# Altium PCB opm.PcbDoc (part 2 of 6)
Units mil, origin at the board's own origin, x right, y up, seen from the top; angles counter-clockwise.
Board outline 4280 x 1445 mil, 4 copper layers (Signal Plane 1, Ground, Power, Signal Plane 2), stack 59.778 mil thick; 104 components, 61 nets, 369 pads, 159 vias.
Unrouted connection lines stored in the file: 4.
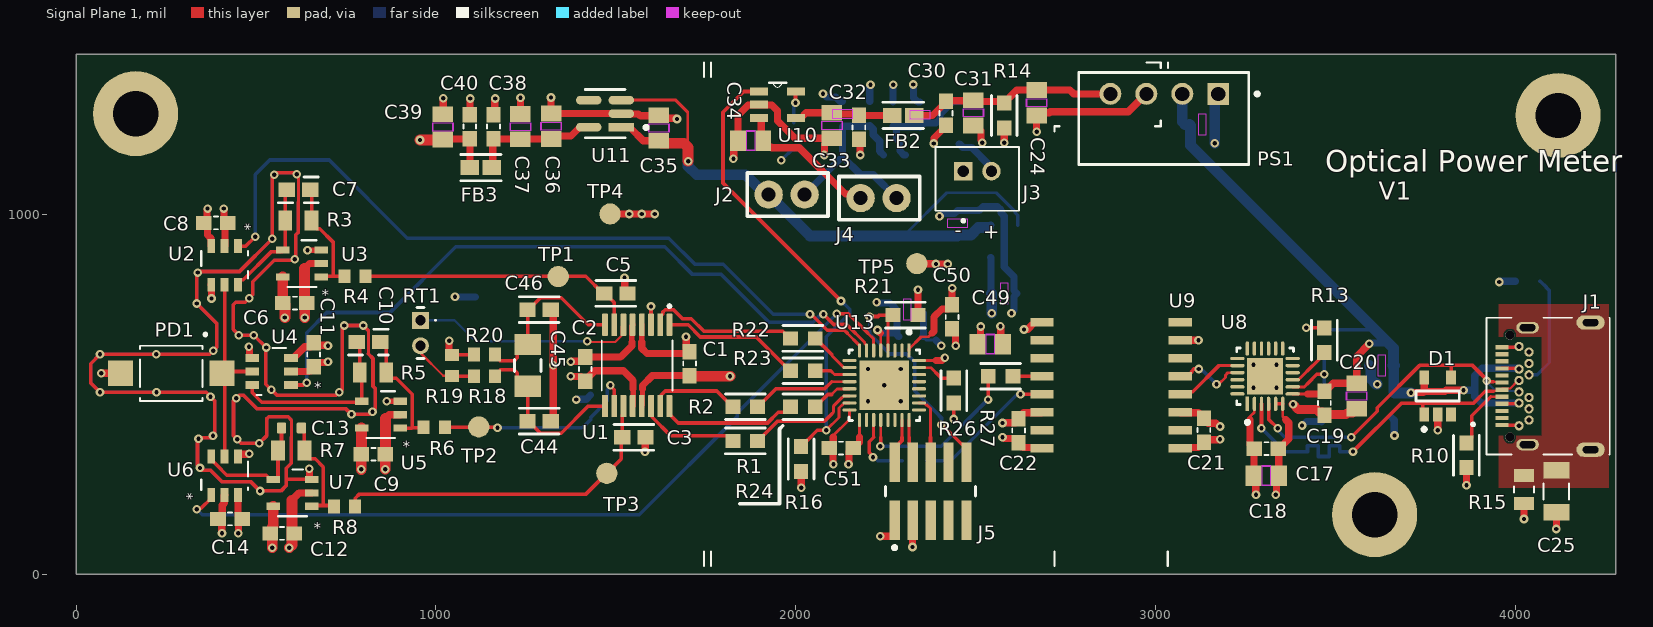
[diagram p0: Signal Plane 1 view]

## Part data (continued)
C25: library part VJ1206Y472KXEAT5Z, "Multilayer Ceramic Capacitor, 4700 pF, 500 V, ± 10%, X7R, 1206 [3216 Metric]", Case Code (Imperial)=1206, Case Code (Metric)=3216, Dielectric=X7R, Dielectric Material=Ceramic, Manufacturer=Vishay, Max Operating Temperature=125°C, Min Operating Temperature=-55°C, Supplier Part Number=720-1031-1-ND, Tolerance=10%, Voltage Rating=500V, Case/Package=1206, Category="Ceramic Capacitors", China RoHS=Compliant, ComponentLink1Description=https://datasheet.octopart.com:443/VJ1206Y472KXEAT5Z-Vishay-datasheet-159617168.pdf?src-supplier=Farnell, ComponentLink1URL=https://datasheet.octopart.com:443/VJ1206Y472KXEAT5Z-Vishay-datasheet-159617168.pdf?src-supplier=Farnell, ComponentLink2Description=https://datasheet.octopart.com:443/VJ1206Y472KXEAT5Z-Vishay-datasheet-149523907.pdf?src-supplier=element14+APAC, ComponentLink2URL=https://datasheet.octopart.com:443/VJ1206Y472KXEAT5Z-Vishay-datasheet-149523907.pdf?src-supplier=element14+APAC, ComponentLink3Description=https://datasheet.octopart.com:443/VJ1206Y472KXEAT5Z-Vishay-datasheet-13557233.pdf?src-supplier=Factory+Futures, ComponentLink3URL=https://datasheet.octopart.com:443/VJ1206Y472KXEAT5Z-Vishay-datasheet-13557233.pdf?src-supplier=Factory+Futures, ComponentLink4Description=https://datasheet.octopart.com:443/VJ1206Y472KXEAT5Z-Vishay-datasheet-12552536.pdf?src-supplier=Factory+Futures, ComponentLink4URL=https://datasheet.octopart.com:443/VJ1206Y472KXEAT5Z-Vishay-datasheet-12552536.pdf?src-supplier=Factory+Futures, ComponentLink5Description=https://datasheet.octopart.com:443/VJ1206Y472KXEAT5Z-Vishay-datasheet-12538810.pdf?src-supplier=Factory+Futures, ComponentLink5URL=https://datasheet.octopart.com:443/VJ1206Y472KXEAT5Z-Vishay-datasheet-12538810.pdf?src-supplier=Factory+Futures, ComponentLink6Description=https://datasheet.octopart.com:443/VJ1206Y472KXEAT5Z-Vishay-datasheet-12527091.pdf?src-supplier=Factory+Futures, ComponentLink6URL=https://datasheet.octopart.com:443/VJ1206Y472KXEAT5Z-Vishay-datasheet-12527091.pdf?src-supplier=Factory+Futures, ComponentLink7Description=https://datasheet.octopart.com:443/VJ1206Y472KXEAT5Z-Vishay-datasheet-12511790.pdf?src-supplier=Factory+Futures, ComponentLink7URL=https://datasheet.octopart.com:443/VJ1206Y472KXEAT5Z-Vishay-datasheet-12511790.pdf?src-supplier=Factory+Futures, ComponentLink8Description=https://datasheet.octopart.com:443/VJ1206Y472KXEAT5Z-Vishay-datasheet-12511142.pdf?src-supplier=Factory+Futures, ComponentLink8URL=https://datasheet.octopart.com:443/VJ1206Y472KXEAT5Z-Vishay-datasheet-12511142.pdf?src-supplier=Factory+Futures, ComponentLink9Description=https://datasheet.octopart.com:443/VJ1206Y472KXEAT5Z-Vishay-datasheet-15670510.pdf?src-supplier=Future+Electronics, ComponentLink9URL=https://datasheet.octopart.com:443/VJ1206Y472KXEAT5Z-Vishay-datasheet-15670510.pdf?src-supplier=Future+Electronics, ComponentLink10Description=https://datasheet.octopart.com:443/VJ1206Y472KXEAT5Z-Vishay-datasheet-10404631.pdf?src-supplier=Future+Electronics, ComponentLink10URL=https://datasheet.octopart.com:443/VJ1206Y472KXEAT5Z-Vishay-datasheet-10404631.pdf?src-supplier=Future+Electronics, ComponentLink11Description=https://datasheet.octopart.com:443/VJ1206Y472KXEAT5Z-Vishay-datasheet-10052095.pdf?src-supplier=Future+Electronics, ComponentLink11URL=https://datasheet.octopart.com:443/VJ1206Y472KXEAT5Z-Vishay-datasheet-10052095.pdf?src-supplier=Future+Electronics, ComponentLink12Description=https://datasheet.octopart.com:443/VJ1206Y472KXEAT5Z-Vishay-datasheet-8361628.pdf?src-supplier=Future+Electronics, ComponentLink12URL=https://datasheet.octopart.com:443/VJ1206Y472KXEAT5Z-Vishay-datasheet-8361628.pdf?src-supplier=Future+Electronics, ComponentLink13Description=https://datasheet.octopart.com:443/VJ1206Y472KXEAT5Z-Vishay-datasheet-5311911.pdf?src-supplier=Future+Electronics, ComponentLink13URL=https://datasheet.octopart.com:443/VJ1206Y472KXEAT5Z-Vishay-datasheet-5311911.pdf?src-supplier=Future+Electronics, ComponentLink14Description=https://datasheet.octopart.com/VJ1206Y472KXEAT5Z-Vishay-datasheet-14932079.pdf, ComponentLink14URL=https://datasheet.octopart.com/VJ1206Y472KXEAT5Z-Vishay-datasheet-14932079.pdf, ComponentLink15Description=http://sigma.octopart.com:80/rohs_statement/Vishay-company-15.pdf?src-supplier=Compliance+Statements, ComponentLink15URL=http://sigma.octopart.com:80/rohs_statement/Vishay-company-15.pdf?src-supplier=Compliance+Statements, Country of Origin=Israel, Export Control Classification Number (ECCN) Code=EAR99, Harmonized Tariff Schedule (HTS) Code=8532.24.00.20, Height=1.7mm, Introduction Date=2007-05-08, Lead Free="Lead Free", Length=3.2mm, Lifecycle Status=Production, Manufacturer Part Number=VJ1206Y472KXEAT5Z, Mounting Technology="Surface Mount", Number of Terminals=2, Packaging=Digi-Reel®, Pricing="1=1.07, 10=0.674, 50=0.5412, 100=0.4947, 500=0.4161, 1000=0.3918 (USD)", REACH SVHC=Yes, RoHS=Compliant, Stock=10395, Supplier=DigiKey, Supplier 1=DigiKey, Supplier Part Number 1=720-1031-1-ND, Termination=SMD/SMT, Thickness=1.7018mm, Voltage Rating (DC)=500V, Width=1.6mm
C35 C36 C41 C42 C48: library part CC0805KKX7R7BB105, "16V 1uF X7R ±10% 0805 Multilayer Ceramic Capacitors MLCC - SMD/SMT ROHS", Case Code (Imperial)=0805, Case Code (Metric)=2012, Dielectric=X7R, Dielectric Material=Ceramic, Manufacturer="Yageo Group", Manufacturer Package Identifier=CC0805-0.85, Max Operating Temperature=125°C, Min Operating Temperature=-55°C, Supplier Part Number=311-1365-1-ND, Tolerance=10%, Voltage Rating=16V, Case/Package=0805, Category="Ceramic Capacitors", China RoHS=Compliant, ComponentLink1Description=https://datasheet.octopart.com:443/CC0805KKX7R7BB105-Yageo-datasheet-177165144.pdf?src-supplier=IHS, ComponentLink1URL=https://datasheet.octopart.com:443/CC0805KKX7R7BB105-Yageo-datasheet-177165144.pdf?src-supplier=IHS, ComponentLink2Description=https://datasheet.octopart.com:443/CC0805KKX7R7BB105-Yageo-datasheet-78855689.pdf?src-supplier=Upverter, ComponentLink2URL=https://datasheet.octopart.com:443/CC0805KKX7R7BB105-Yageo-datasheet-78855689.pdf?src-supplier=Upverter, ComponentLink3Description=https://datasheet.octopart.com:443/CC0805KKX7R7BB105-Yageo-Group-datasheet-189192896.pdf?src-supplier=Future+Electronics, ComponentLink3URL=https://datasheet.octopart.com:443/CC0805KKX7R7BB105-Yageo-Group-datasheet-189192896.pdf?src-supplier=Future+Electronics, ComponentLink4Description=https://datasheet.octopart.com:443/CC0805KKX7R7BB105-Yageo-datasheet-166511530.pdf?src-supplier=Future+Electronics, ComponentLink4URL=https://datasheet.octopart.com:443/CC0805KKX7R7BB105-Yageo-datasheet-166511530.pdf?src-supplier=Future+Electronics, ComponentLink5Description=https://datasheet.octopart.com:443/CC0805KKX7R7BB105-Yageo-datasheet-137700082.pdf?src-supplier=Future+Electronics, ComponentLink5URL=https://datasheet.octopart.com:443/CC0805KKX7R7BB105-Yageo-datasheet-137700082.pdf?src-supplier=Future+Electronics, ComponentLink6Description=https://datasheet.octopart.com:443/CC0805KKX7R7BB105-Yageo-datasheet-137700084.pdf?src-supplier=Future+Electronics, ComponentLink6URL=https://datasheet.octopart.com:443/CC0805KKX7R7BB105-Yageo-datasheet-137700084.pdf?src-supplier=Future+Electronics, ComponentLink7Description=https://datasheet.octopart.com:443/CC0805KKX7R7BB105-Yageo-datasheet-27626582.pdf?src-supplier=Future+Electronics, ComponentLink7URL=https://datasheet.octopart.com:443/CC0805KKX7R7BB105-Yageo-datasheet-27626582.pdf?src-supplier=Future+Electronics, ComponentLink8Description=https://datasheet.octopart.com:443/CC0805KKX7R7BB105-Yageo-datasheet-15895757.pdf?src-supplier=Future+Electronics, ComponentLink8URL=https://datasheet.octopart.com:443/CC0805KKX7R7BB105-Yageo-datasheet-15895757.pdf?src-supplier=Future+Electronics, ComponentLink9Description=https://datasheet.octopart.com:443/CC0805KKX7R7BB105-Yageo-datasheet-12526321.pdf?src-supplier=Future+Electronics, ComponentLink9URL=https://datasheet.octopart.com:443/CC0805KKX7R7BB105-Yageo-datasheet-12526321.pdf?src-supplier=Future+Electronics, ComponentLink10Description=https://datasheet.octopart.com:443/CC0805KKX7R7BB105-Yageo-datasheet-10911834.pdf?src-supplier=Future+Electronics, ComponentLink10URL=https://datasheet.octopart.com:443/CC0805KKX7R7BB105-Yageo-datasheet-10911834.pdf?src-supplier=Future+Electronics, ComponentLink11Description=https://datasheet.octopart.com:443/CC0805KKX7R7BB105-Yageo-datasheet-8324442.pdf?src-supplier=Future+Electronics, ComponentLink11URL=https://datasheet.octopart.com:443/CC0805KKX7R7BB105-Yageo-datasheet-8324442.pdf?src-supplier=Future+Electronics, ComponentLink12Description=https://datasheet.octopart.com/CC0805KKX7R7BB105-Yageo-datasheet-10883670.pdf, ComponentLink12URL=https://datasheet.octopart.com/CC0805KKX7R7BB105-Yageo-datasheet-10883670.pdf, ComponentLink13Description=https://datasheet.octopart.com:443/CC0805KKX7R7BB105-Yageo-datasheet-140260305.pdf?src-supplier=SOS+electronic, ComponentLink13URL=https://datasheet.octopart.com:443/CC0805KKX7R7BB105-Yageo-datasheet-140260305.pdf?src-supplier=SOS+electronic, ComponentLink14Description=https://datasheet.octopart.com:443/CC0805KKX7R7BB105-Yageo-datasheet-147453679.pdf?src-supplier=Farnell, ComponentLink14URL=https://datasheet.octopart.com:443/CC0805KKX7R7BB105-Yageo-datasheet-147453679.pdf?src-supplier=Farnell, ComponentLink15Description=https://datasheet.octopart.com:443/CC0805KKX7R7BB105-Yageo-datasheet-181969634.pdf?src-supplier=Farnell, ComponentLink15URL=https://datasheet.octopart.com:443/CC0805KKX7R7BB105-Yageo-datasheet-181969634.pdf?src-supplier=Farnell, ComponentLink16Description=https://datasheet.octopart.com:443/CC0805KKX7R7BB105-Yageo-datasheet-62336348.pdf?src-supplier=element14+APAC, ComponentLink16URL=https://datasheet.octopart.com:443/CC0805KKX7R7BB105-Yageo-datasheet-62336348.pdf?src-supplier=element14+APAC, ComponentLink17Description=https://datasheet.octopart.com:443/CC0805KKX7R7BB105-Yageo-Group-datasheet-165992755.pdf?src-supplier=ODG+(Origin+Data+Global), ComponentLink17URL=https://datasheet.octopart.com:443/CC0805KKX7R7BB105-Yageo-Group-datasheet-165992755.pdf?src-supplier=ODG+(Origin+Data+Global), ComponentLink18Description=https://datasheet.octopart.com:443/CC0805KKX7R7BB105-Yageo-datasheet-151948686.pdf?src-supplier=TME, ComponentLink18URL=https://datasheet.octopart.com:443/CC0805KKX7R7BB105-Yageo-datasheet-151948686.pdf?src-supplier=TME, ComponentLink19Description=https://datasheet.octopart.com:443/CC0805KKX7R7BB105-Yageo-datasheet-8324192.pdf?src-supplier=TME, ComponentLink19URL=https://datasheet.octopart.com:443/CC0805KKX7R7BB105-Yageo-datasheet-8324192.pdf?src-supplier=TME, ComponentLink20Description=https://datasheet.octopart.com:443/CC0805KKX7R7BB105-Yageo-datasheet-120101875.pdf?src-supplier=Megastar, ComponentLink20URL=https://datasheet.octopart.com:443/CC0805KKX7R7BB105-Yageo-datasheet-120101875.pdf?src-supplier=Megastar, ComponentLink21Description=https://datasheet.octopart.com:443/CC0805KKX7R7BB105-Yageo-datasheet-8701427.pdf?src-supplier=element14, ComponentLink21URL=https://datasheet.octopart.com:443/CC0805KKX7R7BB105-Yageo-datasheet-8701427.pdf?src-supplier=element14, ComponentLink22Description=https://datasheet.octopart.com:443/CC0805KKX7R7BB105-Yageo-datasheet-499490.pdf?src-supplier=element14, ComponentLink22URL=https://datasheet.octopart.com:443/CC0805KKX7R7BB105-Yageo-datasheet-499490.pdf?src-supplier=element14, ComponentLink23Description=https://datasheet.octopart.com:443/CC0805KKX7R7BB105-Yageo-datasheet-5301394.pdf?src-supplier=element14, ComponentLink23URL=https://datasheet.octopart.com:443/CC0805KKX7R7BB105-Yageo-datasheet-5301394.pdf?src-supplier=element14, ComponentLink24Description=http://sigma.octopart.com:80/conflict_mineral_statement/Yageo-company-3.pdf?src-supplier=Compliance+Statements, ComponentLink24URL=http://sigma.octopart.com:80/conflict_mineral_statement/Yageo-company-3.pdf?src-supplier=Compliance+Statements, ComponentLink25Description=http://sigma.octopart.com:80/rohs_statement/Yageo-company-2.pdf?src-supplier=Compliance+Statements, ComponentLink25URL=http://sigma.octopart.com:80/rohs_statement/Yageo-company-2.pdf?src-supplier=Compliance+Statements, Country of Origin="Mainland China, Taiwan", Depth=1.25mm, Export Control Classification Number (ECCN) Code=EAR99, Halogen Free="Halogen Free", Harmonized Tariff Schedule (HTS) Code=8532.24.00.20, Height=1.25mm, Introduction Date=2009-04-17, Lead Free="Lead Free", Length=2mm, Lifecycle Status=Production, Manufacturer Part Number=CC0805KKX7R7BB105, Material=Ceramic, Mounting Technology="Surface Mount", Number of Terminals=2, Pins=2, Pricing="1=0.13, 10=0.072, 50=0.05, 100=0.0434, 500=0.0323, 1000=0.02889 (USD)", Radiation Hardening=No, REACH SVHC=Yes, RoHS=Compliant, Schedule B="8532240020, 8532240020|8532240020|8532240020|8532240020|8532240020|8532240020|8532240020|8532240020|8532240020|8532240020|8532240020|8532240020, 8532240020|8532240020|8532240020|8532240020|8532240020|8532240020|8532240020|8532240020|8532240020|8532240020|8532240020|8532240020|8532240020, 8532240020|8532240020|8532240020|8532240020|8532240020|8532240020|8532240020|8532240020|8532240020|8532240020|8532240020|8532240020|8532240020|8532240020", Stock=898629, Supplier=DigiKey, Supplier 1=DigiKey, Supplier Part Number 1=311-1365-1-ND, Termination=SMD/SMT, Thickness=1.2446mm, Voltage Rating (DC)=16V, Width=1.25mm
C43 C45: library part GRM3195C1H104JA05D, "50V 100nF C0G ±5% 1206 Multilayer Ceramic Capacitors MLCC - SMD/SMT ROHS", Case/Package=1206, Dielectric Material=Ceramic, Manufacturer=Murata, Manufacturer Lifecycle Status="IN PRODUCTION", Max Operating Temperature=125°C, Min Operating Temperature=-55°C, Supplier Part Number=490-GRM3195C1H104JA05DCT-ND, Temperature Coefficient=30ppm/°C, Tolerance=5%, Voltage Rating=50V, Category="Ceramic Capacitors", ComponentLink1Description=https://datasheet.octopart.com:443/GRM3195C1H104JA05D-Murata-datasheet-141279025.pdf?src-supplier=Geoflip, ComponentLink1URL=https://datasheet.octopart.com:443/GRM3195C1H104JA05D-Murata-datasheet-141279025.pdf?src-supplier=Geoflip, ComponentLink2Description=https://datasheet.octopart.com:443/GRM3195C1H104JA05D-Murata-datasheet-165579666.pdf?src-supplier=TME, ComponentLink2URL=https://datasheet.octopart.com:443/GRM3195C1H104JA05D-Murata-datasheet-165579666.pdf?src-supplier=TME, ComponentLink3Description=https://datasheet.octopart.com:443/GRM3195C1H104JA05D-Murata-datasheet-140707903.pdf?src-supplier=Ciiva, ComponentLink3URL=https://datasheet.octopart.com:443/GRM3195C1H104JA05D-Murata-datasheet-140707903.pdf?src-supplier=Ciiva, ComponentLink4Description=https://datasheet.octopart.com:443/GRM3195C1H104JA05D-Murata-datasheet-138745203.pdf?src-supplier=Ciiva, ComponentLink4URL=https://datasheet.octopart.com:443/GRM3195C1H104JA05D-Murata-datasheet-138745203.pdf?src-supplier=Ciiva, ComponentLink5Description=https://datasheet.octopart.com/GRM3195C1H104JA05D-Murata-datasheet-12515295.pdf, ComponentLink5URL=https://datasheet.octopart.com/GRM3195C1H104JA05D-Murata-datasheet-12515295.pdf, ComponentLink6Description=https://datasheet.octopart.com/GRM3195C1H104JA05D-Murata-datasheet-12510076.pdf, ComponentLink6URL=https://datasheet.octopart.com/GRM3195C1H104JA05D-Murata-datasheet-12510076.pdf, ComponentLink7Description=https://datasheet.octopart.com/GRM3195C1H104JA05D-Murata-datasheet-11978611.pdf, ComponentLink7URL=https://datasheet.octopart.com/GRM3195C1H104JA05D-Murata-datasheet-11978611.pdf, ComponentLink8Description=https://datasheet.octopart.com/GRM3195C1H104JA05D-Murata-datasheet-10025737.pdf, ComponentLink8URL=https://datasheet.octopart.com/GRM3195C1H104JA05D-Murata-datasheet-10025737.pdf, ComponentLink9Description=https://datasheet.octopart.com/GRM3195C1H104JA05D-Murata-datasheet-8819587.pdf, ComponentLink9URL=https://datasheet.octopart.com/GRM3195C1H104JA05D-Murata-datasheet-8819587.pdf, ComponentLink10Description=http://sigma.octopart.com:80/reach_statement/Murata-company-16.pdf?src-supplier=Compliance+Statements, ComponentLink10URL=http://sigma.octopart.com:80/reach_statement/Murata-company-16.pdf?src-supplier=Compliance+Statements, Height=850µm, Length=3.2mm, Lifecycle Status=Production, Manufacturer Part Number=GRM3195C1H104JA05D, Material=Ceramic, Mounting Technology="Surface Mount", Number of Terminals=2, Pricing="1=0.34, 10=0.199, 50=0.146, 100=0.1298, 500=0.10224, 1000=0.09376 (USD)", REACH SVHC=Yes, RoHS=Compliant, Stock=3015, Supplier=DigiKey, Supplier 1=DigiKey, Supplier Part Number 1=490-GRM3195C1H104JA05DCT-ND, Thickness=850µm, Voltage Rating (DC)=50V, Width=1.6mm
C47: library part CC0603JRX7R8BB103, "25V 10nF X7R ±5% 0603 Multilayer Ceramic Capacitors MLCC - SMD/SMT ROHS", Case Code (Imperial)=0603, Case Code (Metric)=1608, Dielectric=X7R, Dielectric Material=Ceramic, Insulation Resistance=10GΩ, Manufacturer="Yageo Group", Max Operating Temperature=125°C, Min Operating Temperature=-55°C, Supplier Part Number=311-3995-1-ND, Tolerance=5%, Voltage Rating=25V, Case/Package=0603, Category="Ceramic Capacitors", China RoHS=Compliant, ComponentLink1Description=https://datasheet.octopart.com:443/CC0603JRX7R8BB103-Yageo-datasheet-177165144.pdf?src-supplier=IHS, ComponentLink1URL=https://datasheet.octopart.com:443/CC0603JRX7R8BB103-Yageo-datasheet-177165144.pdf?src-supplier=IHS, ComponentLink2Description=https://datasheet.octopart.com:443/CC0603JRX7R8BB103-Yageo-datasheet-182029658.pdf?src-supplier=Farnell, ComponentLink2URL=https://datasheet.octopart.com:443/CC0603JRX7R8BB103-Yageo-datasheet-182029658.pdf?src-supplier=Farnell, ComponentLink3Description=https://datasheet.octopart.com:443/CC0603JRX7R8BB103-Yageo-datasheet-182029654.pdf?src-supplier=Farnell, ComponentLink3URL=https://datasheet.octopart.com:443/CC0603JRX7R8BB103-Yageo-datasheet-182029654.pdf?src-supplier=Farnell, ComponentLink4Description=https://datasheet.octopart.com:443/CC0603JRX7R8BB103-Yageo-datasheet-147453679.pdf?src-supplier=Farnell, ComponentLink4URL=https://datasheet.octopart.com:443/CC0603JRX7R8BB103-Yageo-datasheet-147453679.pdf?src-supplier=Farnell, ComponentLink5Description=https://datasheet.octopart.com:443/CC0603JRX7R8BB103-Yageo-datasheet-151948686.pdf?src-supplier=Farnell, ComponentLink5URL=https://datasheet.octopart.com:443/CC0603JRX7R8BB103-Yageo-datasheet-151948686.pdf?src-supplier=Farnell, ComponentLink6Description=https://datasheet.octopart.com/CC0603JRX7R8BB103-Yageo-datasheet-10883670.pdf, ComponentLink6URL=https://datasheet.octopart.com/CC0603JRX7R8BB103-Yageo-datasheet-10883670.pdf, ComponentLink7Description=https://datasheet.octopart.com:443/CC0603JRX7R8BB103-Yageo-datasheet-166511530.pdf?src-supplier=Future+Electronics, ComponentLink7URL=https://datasheet.octopart.com:443/CC0603JRX7R8BB103-Yageo-datasheet-166511530.pdf?src-supplier=Future+Electronics, ComponentLink8Description=https://datasheet.octopart.com:443/CC0603JRX7R8BB103-Yageo-datasheet-137700082.pdf?src-supplier=Future+Electronics, ComponentLink8URL=https://datasheet.octopart.com:443/CC0603JRX7R8BB103-Yageo-datasheet-137700082.pdf?src-supplier=Future+Electronics, ComponentLink9Description=https://datasheet.octopart.com:443/CC0603JRX7R8BB103-Yageo-datasheet-137700084.pdf?src-supplier=Future+Electronics, ComponentLink9URL=https://datasheet.octopart.com:443/CC0603JRX7R8BB103-Yageo-datasheet-137700084.pdf?src-supplier=Future+Electronics, ComponentLink10Description=https://datasheet.octopart.com:443/CC0603JRX7R8BB103-Yageo-datasheet-27626582.pdf?src-supplier=Future+Electronics, ComponentLink10URL=https://datasheet.octopart.com:443/CC0603JRX7R8BB103-Yageo-datasheet-27626582.pdf?src-supplier=Future+Electronics, ComponentLink11Description=https://datasheet.octopart.com:443/CC0603JRX7R8BB103-Yageo-datasheet-15895757.pdf?src-supplier=Future+Electronics, ComponentLink11URL=https://datasheet.octopart.com:443/CC0603JRX7R8BB103-Yageo-datasheet-15895757.pdf?src-supplier=Future+Electronics, ComponentLink12Description=https://datasheet.octopart.com:443/CC0603JRX7R8BB103-Yageo-datasheet-12526321.pdf?src-supplier=Future+Electronics, ComponentLink12URL=https://datasheet.octopart.com:443/CC0603JRX7R8BB103-Yageo-datasheet-12526321.pdf?src-supplier=Future+Electronics, ComponentLink13Description=https://datasheet.octopart.com:443/CC0603JRX7R8BB103-Yageo-datasheet-10911834.pdf?src-supplier=Future+Electronics, ComponentLink13URL=https://datasheet.octopart.com:443/CC0603JRX7R8BB103-Yageo-datasheet-10911834.pdf?src-supplier=Future+Electronics, ComponentLink14Description=https://datasheet.octopart.com:443/CC0603JRX7R8BB103-Yageo-datasheet-8324442.pdf?src-supplier=Future+Electronics, ComponentLink14URL=https://datasheet.octopart.com:443/CC0603JRX7R8BB103-Yageo-datasheet-8324442.pdf?src-supplier=Future+Electronics, ComponentLink15Description=https://datasheet.octopart.com:443/CC0603JRX7R8BB103-Yageo-Group-datasheet-165992755.pdf?src-supplier=ODG+(Origin+Data+Global), ComponentLink15URL=https://datasheet.octopart.com:443/CC0603JRX7R8BB103-Yageo-Group-datasheet-165992755.pdf?src-supplier=ODG+(Origin+Data+Global), ComponentLink16Description=http://sigma.octopart.com:80/conflict_mineral_statement/Yageo-company-3.pdf?src-supplier=Compliance+Statements, ComponentLink16URL=http://sigma.octopart.com:80/conflict_mineral_statement/Yageo-company-3.pdf?src-supplier=Compliance+Statements, ComponentLink17Description=http://sigma.octopart.com:80/rohs_statement/Yageo-company-2.pdf?src-supplier=Compliance+Statements, ComponentLink17URL=http://sigma.octopart.com:80/rohs_statement/Yageo-company-2.pdf?src-supplier=Compliance+Statements, Composition=Ceramic, Country of Origin="Mainland China, Taiwan", Depth=800µm, Dissipation Factor=2.5%, Export Control Classification Number (ECCN) Code=EAR99, Halogen Free="Halogen Free", Harmonized Tariff Schedule (HTS) Code=8532.24.00.20, Height=800µm, Introduction Date=2003-01-27, Lead Free="Lead Free", Length=1.6mm, Lifecycle Status=Production, Manufacturer Part Number=CC0603JRX7R8BB103, Mounting Technology="Surface Mount", Number of Terminals=2, Pricing="1=0.1, 10=0.046, 50=0.0312, 100=0.0269, 500=0.01954, 1000=0.01728 (USD)", Radiation Hardening=No, REACH SVHC=Yes, RoHS=Compliant, Schedule B="8532240020, 8532240020|8532240020|8532240020|8532240020|8532240020", Stock=4508, Supplier=DigiKey, Supplier 1=DigiKey, Supplier Part Number 1=311-3995-1-ND, Termination=SMD/SMT, Thickness=889µm, Voltage Rating (DC)=25V, Weight=2.012816mg, Width=800µm
D1: "SP050xBA Series 8 V 30 pF Uni-Directional SMT TVS Avalanche Diode Array SOT-23-5", Breakdown Voltage=5.5V, Case/Package=SOT-23, Clamping Voltage=6.8V, Leakage Current=100nA, Manufacturer=Littelfuse, Max Operating Temperature=125°C, Max Power Dissipation=225mW, Min Operating Temperature=-40°C, Peak Pulse Power=25W, Power Line Protection=No, Supplier Part Number=F3157CT-ND, Voltage Rating (DC)=5V, Category="TVS Diodes", ComponentLink1Description=https://datasheet.octopart.com:443/SP0504BAHTG-Littelfuse-datasheet-180609594.pdf?src-supplier=IHS, ComponentLink1URL=https://datasheet.octopart.com:443/SP0504BAHTG-Littelfuse-datasheet-180609594.pdf?src-supplier=IHS, ComponentLink2Description=https://datasheet.octopart.com:443/SP0504BAHTG-Littelfuse-datasheet-137315643.pdf?src-supplier=JRH+Electronics, ComponentLink2URL=https://datasheet.octopart.com:443/SP0504BAHTG-Littelfuse-datasheet-137315643.pdf?src-supplier=JRH+Electronics, ComponentLink3Description=https://datasheet.octopart.com:443/SP0504BAHTG-Littelfuse-datasheet-65933529.pdf?src-supplier=element14+APAC, ComponentLink3URL=https://datasheet.octopart.com:443/SP0504BAHTG-Littelfuse-datasheet-65933529.pdf?src-supplier=element14+APAC, ComponentLink4Description=https://datasheet.octopart.com:443/SP0504BAHTG-Littelfuse-datasheet-14434284.pdf?src-supplier=element14+APAC, ComponentLink4URL=https://datasheet.octopart.com:443/SP0504BAHTG-Littelfuse-datasheet-14434284.pdf?src-supplier=element14+APAC, ComponentLink5Description=https://datasheet.octopart.com:443/SP0504BAHTG-Littelfuse-datasheet-165517320.pdf?src-supplier=Newark, ComponentLink5URL=https://datasheet.octopart.com:443/SP0504BAHTG-Littelfuse-datasheet-165517320.pdf?src-supplier=Newark, ComponentLink6Description=https://datasheet.octopart.com:443/SP0504BAHTG-Littelfuse-datasheet-8328482.pdf?src-supplier=Newark, ComponentLink6URL=https://datasheet.octopart.com:443/SP0504BAHTG-Littelfuse-datasheet-8328482.pdf?src-supplier=Newark, ComponentLink7Description=https://datasheet.octopart.com:443/SP0504BAHTG-Littelfuse-datasheet-32996.pdf?src-supplier=Newark, ComponentLink7URL=https://datasheet.octopart.com:443/SP0504BAHTG-Littelfuse-datasheet-32996.pdf?src-supplier=Newark, ComponentLink8Description=https://datasheet.octopart.com:443/SP0504BAHTG-Littelfuse-datasheet-173467575.pdf?src-supplier=Future+Electronics, ComponentLink8URL=https://datasheet.octopart.com:443/SP0504BAHTG-Littelfuse-datasheet-173467575.pdf?src-supplier=Future+Electronics, ComponentLink9Description=https://datasheet.octopart.com:443/SP0504BAHTG-Littelfuse-datasheet-125842.pdf?src-supplier=Future+Electronics, ComponentLink9URL=https://datasheet.octopart.com:443/SP0504BAHTG-Littelfuse-datasheet-125842.pdf?src-supplier=Future+Electronics, ComponentLink10Description=https://datasheet.octopart.com:443/SP0504BAHTG-Littelfuse-datasheet-43099464.pdf?src-supplier=RS+(Formerly+Allied+Electronics), ComponentLink10URL=https://datasheet.octopart.com:443/SP0504BAHTG-Littelfuse-datasheet-43099464.pdf?src-supplier=RS+(Formerly+Allied+Electronics), ComponentLink11Description=https://datasheet.octopart.com:443/SP0504BAHTG-Littelfuse-datasheet-14049100.pdf?src-supplier=iiiC, ComponentLink11URL=https://datasheet.octopart.com:443/SP0504BAHTG-Littelfuse-datasheet-14049100.pdf?src-supplier=iiiC, ComponentLink12Description=https://datasheet.octopart.com:443/SP0504BAHTG-Littelfuse-datasheet-8817999.pdf?src-supplier=Farnell, ComponentLink12URL=https://datasheet.octopart.com:443/SP0504BAHTG-Littelfuse-datasheet-8817999.pdf?src-supplier=Farnell, ComponentLink13Description=https://datasheet.octopart.com:443/SP0504BAHTG-Littelfuse-datasheet-622385.pdf?src-supplier=Fuses+Unlimited, ComponentLink13URL=https://datasheet.octopart.com:443/SP0504BAHTG-Littelfuse-datasheet-622385.pdf?src-supplier=Fuses+Unlimited, Composition=Zener, Country of Origin="Mainland China", Depth=1.75mm, Diode Type=Avalanche, Direction=Unidirectional, Element Configuration="Common Anode", ESD Protection=Yes, Export Control Classification Number (ECCN) Code=EAR99, Harmonized Tariff Schedule (HTS) Code=8541.10.00.50, Height=1.45mm, Introduction Date=2002-07-25, Lead Free="Lead Free", Length=3.05mm, Lifecycle Status=Production, Manufacturer Part Number=SP0504BAHTG, Max Reverse Leakage Current=100nA, Mounting Technology="Surface Mount", Number of Channels=4, Number of Elements=4, Number of Terminals=5, Number of Unidirectional Channels=4, Operating Supply Voltage=5.5V, Packaging="Cut Tape", Pins=5, Polarity=Unidirectional, Power Dissipation=225mW, Pricing="1=0.84, 10=0.723, 100=0.529, 500=0.424, 1000=0.401, 3000=0.36652, 6000=0.32689 (USD)", Radiation Hardening=No, REACH SVHC=Yes, Reverse Standoff Voltage=5.5V, RoHS=Compliant, Schedule B="8536300000, 8536300000|8536300000, 8536300000|8536300000|8536300000, 8536300000|8536300000|8536300000|8536300000", Stock=10352, Supplier=DigiKey, Supplier 1=DigiKey, Supplier Part Number 1=F3157CT-ND, Termination=SMD/SMT, Width=1.75mm, Working Voltage=5.5V
F1: library part 0ZCJ0050FF2G, "Resettable Fuse, PPTC, 1206 (3216 Metric), 0ZCJ Series, 8 VDC, 500 mA, 1 A, 0.1 s", Case Code (Imperial)=1206, Case Code (Metric)=3216, Current Rating=100A, Hold Current=500mA, Manufacturer="Bel Fuse", Max Operating Temperature=85°C, Maximum Resistance 1 Hour (R1max)=700mΩ, Min Operating Temperature=-40°C, Supplier Part Number=5923-0ZCJ0050FF2GCT-ND, Trip Current=1A, Voltage Rating=8V, Case/Package=1206, Category="PTC Resettable Fuses", China RoHS=Compliant, ComponentLink1Description=https://datasheet.octopart.com:443/0ZCJ0050FF2G-Bel-Fuse-datasheet-182141362.pdf?src-supplier=IHS, ComponentLink1URL=https://datasheet.octopart.com:443/0ZCJ0050FF2G-Bel-Fuse-datasheet-182141362.pdf?src-supplier=IHS, ComponentLink2Description=https://datasheet.octopart.com:443/0ZCJ0050FF2G-Bel-Fuse-datasheet-137696978.pdf?src-supplier=JRH+Electronics, ComponentLink2URL=https://datasheet.octopart.com:443/0ZCJ0050FF2G-Bel-Fuse-datasheet-137696978.pdf?src-supplier=JRH+Electronics, ComponentLink3Description=https://datasheet.octopart.com:443/0ZCJ0050FF2G-Bel-Fuse-datasheet-102831406.pdf?src-supplier=Sager+Electronics, ComponentLink3URL=https://datasheet.octopart.com:443/0ZCJ0050FF2G-Bel-Fuse-datasheet-102831406.pdf?src-supplier=Sager+Electronics, ComponentLink4Description=https://datasheet.octopart.com:443/0ZCJ0050FF2G-Bel-Fuse-datasheet-154728314.pdf?src-supplier=Electro+Sonic, ComponentLink4URL=https://datasheet.octopart.com:443/0ZCJ0050FF2G-Bel-Fuse-datasheet-154728314.pdf?src-supplier=Electro+Sonic, Contact Plating=Tin, Height=550µm, Lead Free="Lead Free", Lifecycle Status=Production, Manufacturer Part Number=0ZCJ0050FF2G, Max Current Rating=100A, Mounting Technology="Surface Mount", Number of Terminals=2, Packaging="Tape & Reel (TR)", Pricing="1=0.2, 5=0.164, 10=0.151, 50=0.1252, 100=0.1155, 250=0.10384, 500=0.0958, 1000=0.08838 (USD)", REACH SVHC=Yes, RoHS=Compliant, Stock=99354, Supplier=DigiKey, Supplier 1=DigiKey, Supplier Part Number 1=5923-0ZCJ0050FF2GCT-ND, Time to Trip=100ms, Width=1.8mm, Working Voltage=8V
FB1 FB2 FB3: "Ferrite Beads Multi-Layer 600Ohm 25% 100MHz 500mA 380mOhm DCR 0603 Automotive Paper T/R", Case Code (Imperial)=0603, Case Code (Metric)=1608, Clock Frequency=100MHz, Current Rating=500mA, DC Resistance (DCR)=380mΩ, Manufacturer=Murata, Max Operating Temperature=125°C, Min Operating Temperature=-55°C, Supplier Part Number=490-1014-1-ND, Tolerance=25%, Case/Package=0603, Category="Ferrite Beads and Chips", ComponentLink1Description=https://datasheet.octopart.com:443/BLM18AG601SN1D-Murata-datasheet-180806579.pdf?src-supplier=IHS, ComponentLink1URL=https://datasheet.octopart.com:443/BLM18AG601SN1D-Murata-datasheet-180806579.pdf?src-supplier=IHS, ComponentLink2Description=https://datasheet.octopart.com:443/BLM18AG601SN1D-Murata-datasheet-41195.pdf?src-supplier=Upverter, ComponentLink2URL=https://datasheet.octopart.com:443/BLM18AG601SN1D-Murata-datasheet-41195.pdf?src-supplier=Upverter, ComponentLink3Description=https://datasheet.octopart.com:443/BLM18AG601SN1D-Murata-datasheet-11743096.pdf?src-supplier=Newark, ComponentLink3URL=https://datasheet.octopart.com:443/BLM18AG601SN1D-Murata-datasheet-11743096.pdf?src-supplier=Newark, ComponentLink4Description=https://datasheet.octopart.com:443/BLM18AG601SN1D-Murata-datasheet-5338592.pdf?src-supplier=Newark, ComponentLink4URL=https://datasheet.octopart.com:443/BLM18AG601SN1D-Murata-datasheet-5338592.pdf?src-supplier=Newark, ComponentLink5Description=https://datasheet.octopart.com:443/BLM18AG601SN1D-Murata-datasheet-511221.pdf?src-supplier=TME, ComponentLink5URL=https://datasheet.octopart.com:443/BLM18AG601SN1D-Murata-datasheet-511221.pdf?src-supplier=TME, ComponentLink6Description=https://datasheet.octopart.com:443/BLM18AG601SN1D-Murata-datasheet-135086656.pdf?src-supplier=TME, ComponentLink6URL=https://datasheet.octopart.com:443/BLM18AG601SN1D-Murata-datasheet-135086656.pdf?src-supplier=TME, ComponentLink7Description=https://datasheet.octopart.com:443/BLM18AG601SN1D-Murata-datasheet-5396529.pdf?src-supplier=Factory+Futures, ComponentLink7URL=https://datasheet.octopart.com:443/BLM18AG601SN1D-Murata-datasheet-5396529.pdf?src-supplier=Factory+Futures, ComponentLink8Description=https://datasheet.octopart.com:443/BLM18AG601SN1D-Murata-datasheet-141257898.pdf?src-supplier=Ciiva, ComponentLink8URL=https://datasheet.octopart.com:443/BLM18AG601SN1D-Murata-datasheet-141257898.pdf?src-supplier=Ciiva, ComponentLink9Description=https://datasheet.octopart.com:443/BLM18AG601SN1D-Murata-datasheet-138706784.pdf?src-supplier=Ciiva, ComponentLink9URL=https://datasheet.octopart.com:443/BLM18AG601SN1D-Murata-datasheet-138706784.pdf?src-supplier=Ciiva, ComponentLink10Description=https://datasheet.octopart.com:443/BLM18AG601SN1D-Murata-datasheet-78375072.pdf?src-supplier=Future+Electronics, ComponentLink10URL=https://datasheet.octopart.com:443/BLM18AG601SN1D-Murata-datasheet-78375072.pdf?src-supplier=Future+Electronics, ComponentLink11Description=https://datasheet.octopart.com:443/BLM18AG601SN1D-Murata-datasheet-58177255.pdf?src-supplier=Future+Electronics, ComponentLink11URL=https://datasheet.octopart.com:443/BLM18AG601SN1D-Murata-datasheet-58177255.pdf?src-supplier=Future+Electronics, ComponentLink12Description=https://datasheet.octopart.com/BLM18AG601SN1D-Murata-datasheet-37129980.pdf, ComponentLink12URL=https://datasheet.octopart.com/BLM18AG601SN1D-Murata-datasheet-37129980.pdf, ComponentLink13Description=https://datasheet.octopart.com:443/BLM18AG601SN1D-Murata-datasheet-14066397.pdf?src-supplier=iiiC, ComponentLink13URL=https://datasheet.octopart.com:443/BLM18AG601SN1D-Murata-datasheet-14066397.pdf?src-supplier=iiiC, ComponentLink14Description=https://datasheet.octopart.com:443/BLM18AG601SN1D-Murata-datasheet-9604654.pdf?src-supplier=RS+(Formerly+Allied+Electronics), ComponentLink14URL=https://datasheet.octopart.com:443/BLM18AG601SN1D-Murata-datasheet-9604654.pdf?src-supplier=RS+(Formerly+Allied+Electronics), ComponentLink15Description=https://datasheet.octopart.com:443/BLM18AG601SN1D-Murata-datasheet-13143.pdf?src-supplier=RS+(Formerly+Allied+Electronics), ComponentLink15URL=https://datasheet.octopart.com:443/BLM18AG601SN1D-Murata-datasheet-13143.pdf?src-supplier=RS+(Formerly+Allied+Electronics), ComponentLink16Description=https://datasheet.octopart.com:443/BLM18AG601SN1D-Murata-datasheet-7628479.pdf?src-supplier=Jameco, ComponentLink16URL=https://datasheet.octopart.com:443/BLM18AG601SN1D-Murata-datasheet-7628479.pdf?src-supplier=Jameco, ComponentLink17Description=https://datasheet.octopart.com:443/BLM18AG601SN1D-Murata-datasheet-11030792.pdf?src-supplier=Farnell, ComponentLink17URL=https://datasheet.octopart.com:443/BLM18AG601SN1D-Murata-datasheet-11030792.pdf?src-supplier=Farnell, ComponentLink18Description=http://sigma.octopart.com:80/reach_statement/Murata-company-16.pdf?src-supplier=Compliance+Statements, ComponentLink18URL=http://sigma.octopart.com:80/reach_statement/Murata-company-16.pdf?src-supplier=Compliance+Statements, Core Material=Ferrite, Country of Origin="Japan, Thailand", DC Current=500mA, Depth=800µm, ESR=380mΩ, Export Control Classification Number (ECCN) Code=EAR99, Frequency=100MHz, Harmonized Tariff Schedule (HTS) Code=8504.50.80.00, Height=800µm, Impedance=600Ω, Introduction Date=2001-08-28, Lead Free="Lead Free", Length=1.6mm, Lifecycle Status=Production, Manufacturer Part Number=BLM18AG601SN1D, Material="Ferrite, Steel", Max Current Rating=500mA, Max DC Current=500mA, Military Standard=Not, Number of Circuits=1, Number of Lines=1, Number of Terminals=2, Packaging="Cut Tape", Pins=2, Pricing="1=0.1, 10=0.057, 25=0.0496, 50=0.0446, 100=0.0401, 250=0.03456, 500=0.03076, 1000=0.02726 (USD)", Radiation Hardening=No, REACH SVHC=Yes, RMS Current (Irms)=500mA, RoHS=Compliant, Schedule B="8543706000, 8543706000|8543706000, 8543706000|8543706000|8543706000, 8543706000|8543706000|8543706000|8543706000", Shielding=Unshielded, Stock=1054512, Supplier=DigiKey, Supplier 1=DigiKey, Supplier Part Number 1=490-1014-1-ND, Termination=SMD/SMT, Test Frequency=100MHz, Weight=2.012816mg, Width=800µm
J1: "Conn USB Type C Receptacle 24 POS 0.5mm RA Surface Mount/Through Hole Single Port T/R", Dielectric Material=Polyethylene, Manufacturer="Amphenol Communications Solutions", Max Operating Temperature=85°C, Min Operating Temperature=-55°C, Supplier Part Number=609-6109-1-ND, Voltage Rating=100V, Category="USB Connectors", ComponentLink1Description=https://datasheet.octopart.com:443/10137062-00021LF-Amphenol-Communications-Solutions-datasheet-182241635.pdf?src-supplier=IHS, ComponentLink1URL=https://datasheet.octopart.com:443/10137062-00021LF-Amphenol-Communications-Solutions-datasheet-182241635.pdf?src-supplier=IHS, ComponentLink2Description=https://datasheet.octopart.com:443/10137062-00021LF-Amphenol-Communications-Solutions-datasheet-168215092.pdf?src-supplier=Master+Electronics, ComponentLink2URL=https://datasheet.octopart.com:443/10137062-00021LF-Amphenol-Communications-Solutions-datasheet-168215092.pdf?src-supplier=Master+Electronics, ComponentLink3Description=https://datasheet.octopart.com:443/10137062-00021LF-Amphenol-Communications-Solutions-datasheet-100454240.pdf?src-supplier=Newark, ComponentLink3URL=https://datasheet.octopart.com:443/10137062-00021LF-Amphenol-Communications-Solutions-datasheet-100454240.pdf?src-supplier=Newark, Contact Gender=Male, Contact Material="Gold, Nickel", Height=3.5mm, Lifecycle Status=Production, Manufacturer Part Number=10137062-00021LF, Number of Contacts=24, Number of Ports=1, Orientation=Horizontal, Pins=24, Plating Thickness=762nm, Pricing="1=2.19, 10=1.857, 25=1.74, 50=1.657, 100=1.5777, 250=1.47888, 500=1.40828 (USD)", REACH SVHC=Yes, RoHS=Compliant, Schedule B="8536695050, 8536695050|8536695050|8536695050|8536695050|8536695050|8536695050|8536695050|8536695050|8536695050|8536695050|8536695050|8536695050|8536695050|8536695050|8536695050|8536695050|8536695050|8536695050|8536695050|8536695050|8536695050|8536695050|8536695050|85", Shell Finish=Nickel, Shell Material="Stainless Steel", Stock=7299, Supplier=DigiKey, Supplier 1=DigiKey, Supplier Part Number 1=609-6109-1-ND, USB Standard="USB 3.1"
J3: "CONN HEADER VERT 2POS 2MM / 2.0mm pitch/Disconnectable Crimp style connectors", Color=Natural, Contact Resistance=20mΩ, Current Rating=2A, Dielectric Material=Polyamide, Insulation Resistance=1GΩ, Manufacturer=JST, Max Operating Temperature=85°C, Min Operating Temperature=-25°C, Supplier Part Number=455-1704-ND, Test Voltage=800V, Category="Headers and Wire Housings", ComponentLink1Description=https://datasheet.octopart.com:443/B2B-PH-K-S-JST-datasheet-15068535.pdf?src-supplier=IHS, ComponentLink1URL=https://datasheet.octopart.com:443/B2B-PH-K-S-JST-datasheet-15068535.pdf?src-supplier=IHS, ComponentLink2Description=https://datasheet.octopart.com:443/B2B-PH-K-S-JST-datasheet-12510261.pdf?src-supplier=TME, ComponentLink2URL=https://datasheet.octopart.com:443/B2B-PH-K-S-JST-datasheet-12510261.pdf?src-supplier=TME, ComponentLink3Description=https://datasheet.octopart.com:443/B2B-PH-K-S-JST-datasheet-56537.pdf?src-supplier=DigiKey, ComponentLink3URL=https://datasheet.octopart.com:443/B2B-PH-K-S-JST-datasheet-56537.pdf?src-supplier=DigiKey, Connector Type="Male Pin", Contact Gender=Male, Contact Mating Length=3.302mm, Contact Plating="Lead, Tin", Export Control Classification Number (ECCN) Code=EAR99, Fastening Type=Detent, Gender=Male, Harmonized Tariff Schedule (HTS) Code=8536.69.40.40, Housing Color=Natural, Housing Material=Nylon, Introduction Date=1996-12-01, Lead Free="Contains Lead", Lead Pitch=2mm, Lifecycle Status=Obsolete, Manufacturer Part Number=B2B-PH-K-S, Mounting Technology="Through Hole", Number of Contacts=2, Number of Positions=2, Number of Rows=1, Orientation=Vertical, Packaging=Bulk, Pins=2, Pitch=2.0066mm, Pricing="1=0.11, 10=0.098, 100=0.0829, 500=0.07398, 1000=0.07043, 5000=0.06286, 10000=0.05986 (USD)", RoHS=Compliant, Supplier=DigiKey, Supplier 1=DigiKey, Supplier Part Number 1=455-1704-ND, Terminal Pitch=2mm, Termination=Press-Fit
J5: "Conn Shrouded Header (2 Sides) HDR 10 POS 1.27mm Solder ST Top Entry SMD TIGER CLAW™ Tube", Color=Black, Manufacturer=Samtec, Manufacturer Lifecycle Status=PRODUCTION, Max Current Rating=1.75A, Max Operating Temperature=125°C, Min Operating Temperature=-55°C, Supplier Part Number=SAM8799-ND, Category="Headers and Wire Housings", ComponentLink1Description=https://datasheet.octopart.com:443/FTSH-105-01-L-DV-K-Samtec-datasheet-140825048.pdf?src-supplier=Electro+Sonic, ComponentLink1URL=https://datasheet.octopart.com:443/FTSH-105-01-L-DV-K-Samtec-datasheet-140825048.pdf?src-supplier=Electro+Sonic, ComponentLink2Description=https://datasheet.octopart.com:443/FTSH-105-01-L-DV-K-Samtec-datasheet-86818370.pdf?src-supplier=Upverter, ComponentLink2URL=https://datasheet.octopart.com:443/FTSH-105-01-L-DV-K-Samtec-datasheet-86818370.pdf?src-supplier=Upverter, ComponentLink3Description=https://datasheet.octopart.com:443/FTSH-105-01-L-DV-K-Samtec-datasheet-97029545.pdf?src-supplier=Newark, ComponentLink3URL=https://datasheet.octopart.com:443/FTSH-105-01-L-DV-K-Samtec-datasheet-97029545.pdf?src-supplier=Newark, ComponentLink4Description=https://datasheet.octopart.com:443/FTSH-105-01-L-DV-K-Samtec-datasheet-41642889.pdf?src-supplier=Newark, ComponentLink4URL=https://datasheet.octopart.com:443/FTSH-105-01-L-DV-K-Samtec-datasheet-41642889.pdf?src-supplier=Newark, ComponentLink5Description=https://sigma.octopart.com:443/140871554/technical_drawing/Samtec-FTSH-105-01-L-DV-K.pdf?src-supplier=Samtec, ComponentLink5URL=https://sigma.octopart.com:443/140871554/technical_drawing/Samtec-FTSH-105-01-L-DV-K.pdf?src-supplier=Samtec, ComponentLink6Description=https://sigma.octopart.com:443/97029548/technical_drawing/Samtec-FTSH-105-01-L-DV-K.pdf?src-supplier=Samtec, ComponentLink6URL=https://sigma.octopart.com:443/97029548/technical_drawing/Samtec-FTSH-105-01-L-DV-K.pdf?src-supplier=Samtec, ComponentLink7Description=https://datasheet.octopart.com:443/FTSH-105-01-L-DV-K-Samtec-datasheet-100454331.pdf?src-supplier=Farnell, ComponentLink7URL=https://datasheet.octopart.com:443/FTSH-105-01-L-DV-K-Samtec-datasheet-100454331.pdf?src-supplier=Farnell, ComponentLink8Description=https://datasheet.octopart.com:443/FTSH-105-01-L-DV-K-Samtec-datasheet-33007714.pdf?src-supplier=Farnell, ComponentLink8URL=https://datasheet.octopart.com:443/FTSH-105-01-L-DV-K-Samtec-datasheet-33007714.pdf?src-supplier=Farnell, ComponentLink9Description=https://datasheet.octopart.com:443/FTSH-105-01-L-DV-K-Samtec-datasheet-16646209.pdf?src-supplier=element14+APAC, ComponentLink9URL=https://datasheet.octopart.com:443/FTSH-105-01-L-DV-K-Samtec-datasheet-16646209.pdf?src-supplier=element14+APAC, ComponentLink10Description=https://datasheet.octopart.com:443/FTSH-105-01-L-DV-K-Samtec-datasheet-180249087.pdf?src-supplier=JRH+Electronics, ComponentLink10URL=https://datasheet.octopart.com:443/FTSH-105-01-L-DV-K-Samtec-datasheet-180249087.pdf?src-supplier=JRH+Electronics, ComponentLink11Description=https://datasheet.octopart.com:443/FTSH-105-01-L-DV-K-Samtec-datasheet-176663386.pdf?src-supplier=Toby+Electronics, ComponentLink11URL=https://datasheet.octopart.com:443/FTSH-105-01-L-DV-K-Samtec-datasheet-176663386.pdf?src-supplier=Toby+Electronics, ComponentLink12Description=https://datasheet.octopart.com:443/FTSH-105-01-L-DV-K-Samtec-datasheet-133497664.pdf?src-supplier=Toby+Electronics, ComponentLink12URL=https://datasheet.octopart.com:443/FTSH-105-01-L-DV-K-Samtec-datasheet-133497664.pdf?src-supplier=Toby+Electronics, ComponentLink13Description=https://datasheet.octopart.com:443/FTSH-105-01-L-DV-K-Samtec-datasheet-116535196.pdf?src-supplier=Toby+Electronics, ComponentLink13URL=https://datasheet.octopart.com:443/FTSH-105-01-L-DV-K-Samtec-datasheet-116535196.pdf?src-supplier=Toby+Electronics, ComponentLink14Description=https://datasheet.octopart.com:443/FTSH-105-01-L-DV-K-Samtec-datasheet-151470459.pdf?src-supplier=Sager+Electronics, ComponentLink14URL=https://datasheet.octopart.com:443/FTSH-105-01-L-DV-K-Samtec-datasheet-151470459.pdf?src-supplier=Sager+Electronics, ComponentLink15Description=https://datasheet.octopart.com:443/FTSH-105-01-L-DV-K-Samtec-datasheet-151470458.pdf?src-supplier=Sager+Electronics, ComponentLink15URL=https://datasheet.octopart.com:443/FTSH-105-01-L-DV-K-Samtec-datasheet-151470458.pdf?src-supplier=Sager+Electronics, ComponentLink16Description=https://datasheet.octopart.com:443/FTSH-105-01-L-DV-K-Samtec-datasheet-137316104.pdf?src-supplier=Future+Electronics, ComponentLink16URL=https://datasheet.octopart.com:443/FTSH-105-01-L-DV-K-Samtec-datasheet-137316104.pdf?src-supplier=Future+Electronics, ComponentLink17Description=https://datasheet.octopart.com/FTSH-105-01-L-DV-K-Samtec-datasheet-13696953.pdf, ComponentLink17URL=https://datasheet.octopart.com/FTSH-105-01-L-DV-K-Samtec-datasheet-13696953.pdf, ComponentLink18Description=https://datasheet.octopart.com/FTSH-105-01-L-DV-K-Samtec-datasheet-11553404.pdf, ComponentLink18URL=https://datasheet.octopart.com/FTSH-105-01-L-DV-K-Samtec-datasheet-11553404.pdf, Connector Type="Male Pin", Contact Material=Bronze, Contact Mating Length=3.048mm, Contact Plating=Gold, Depth=3.43mm, Gender=Female, Housing Color=Black, Housing Material=Polymer, Lead Free="Lead Free", Length=6.35mm, Lifecycle Status=Production, Manufacturer Part Number=FTSH-105-01-L-DV-K, Mounting Technology="Surface Mount", Number of Contacts=10, Number of Positions=10, Number of Rows=2, Pins=10, Pitch=1.27mm, Pricing="1=2.48, 100=1.95, 250=1.76, 500=1.55, 1000=1.36, 2500=1.23, 5000=1.15, 10000=0.99 (USD)", Radiation Hardening=No, REACH SVHC=No, RoHS=Compliant, Row Spacing=1.27mm, Stock=29958, Supplier=DigiKey, Supplier 1=DigiKey, Supplier Part Number 1=SAM8799-ND, Termination=Solder
PD1: "IR-photodiode Photoelectric current: 45...55 uA Wavelength of max. photosensitivity: 940 nm", Breakdown Voltage=60V, Case/Package=SMD/SMT, Dark Current=30nA, Forward Current=50mA, Forward Voltage=1.3V, Manufacturer=Vishay, Max Operating Temperature=100°C, Max Power Dissipation=215mW, Min Operating Temperature=-40°C, Supplier Part Number=751-1500-6-ND, Supplier Part Number 1=751-1500-1-ND, Category=Photodiodes, ComponentLink1Description=https://datasheet.octopart.com:443/VBPW34S-Vishay-datasheet-181477396.pdf?src-supplier=IHS, ComponentLink1URL=https://datasheet.octopart.com:443/VBPW34S-Vishay-datasheet-181477396.pdf?src-supplier=IHS, ComponentLink2Description=https://datasheet.octopart.com:443/VBPW34S-Vishay-datasheet-141435336.pdf?src-supplier=Upverter, ComponentLink2URL=https://datasheet.octopart.com:443/VBPW34S-Vishay-datasheet-141435336.pdf?src-supplier=Upverter, ComponentLink3Description=https://datasheet.octopart.com:443/VBPW34S-Vishay-datasheet-8636772.pdf?src-supplier=Farnell, ComponentLink3URL=https://datasheet.octopart.com:443/VBPW34S-Vishay-datasheet-8636772.pdf?src-supplier=Farnell, ComponentLink4Description=https://datasheet.octopart.com:443/VBPW34S-Vishay-datasheet-24897338.pdf?src-supplier=Farnell, ComponentLink4URL=https://datasheet.octopart.com:443/VBPW34S-Vishay-datasheet-24897338.pdf?src-supplier=Farnell, ComponentLink5Description=https://datasheet.octopart.com:443/VBPW34S-Vishay-datasheet-41195834.pdf?src-supplier=Farnell, ComponentLink5URL=https://datasheet.octopart.com:443/VBPW34S-Vishay-datasheet-41195834.pdf?src-supplier=Farnell, ComponentLink6Description=https://datasheet.octopart.com:443/VBPW34S-Vishay-datasheet-62319496.pdf?src-supplier=Newark, ComponentLink6URL=https://datasheet.octopart.com:443/VBPW34S-Vishay-datasheet-62319496.pdf?src-supplier=Newark, ComponentLink7Description=https://datasheet.octopart.com:443/VBPW34S-Vishay-datasheet-8820987.pdf?src-supplier=element14+APAC, ComponentLink7URL=https://datasheet.octopart.com:443/VBPW34S-Vishay-datasheet-8820987.pdf?src-supplier=element14+APAC, ComponentLink8Description=https://datasheet.octopart.com:443/VBPW34S-Vishay-datasheet-108049364.pdf?src-supplier=Future+Electronics, ComponentLink8URL=https://datasheet.octopart.com:443/VBPW34S-Vishay-datasheet-108049364.pdf?src-supplier=Future+Electronics, ComponentLink9Description=https://datasheet.octopart.com:443/VBPW34S-Vishay-datasheet-81857105.pdf?src-supplier=TME, ComponentLink9URL=https://datasheet.octopart.com:443/VBPW34S-Vishay-datasheet-81857105.pdf?src-supplier=TME, ComponentLink10Description=http://sigma.octopart.com:80/rohs_statement/Vishay-company-15.pdf?src-supplier=Compliance+Statements, ComponentLink10URL=http://sigma.octopart.com:80/rohs_statement/Vishay-company-15.pdf?src-supplier=Compliance+Statements, Contact Plating=Tin, Diode Type=PIN, Fall Time=100ns, Height=1.2mm, Introduction Date=2009-10-04, Lead Free="Lead Free", Length=4.4mm, Lifecycle Status=Production, Manufacturer Part Number=VBPW34S, Max Reverse Voltage (DC)=60V, Mounting Technology="Surface Mount", Number of Circuits=1, Peak Wavelength=940nm, Pins=2, Power Dissipation=215mW, Pricing="1=1.17, 10=0.822, 100=0.6118, 500=0.5182 (USD)", Radiation Hardening=No, REACH SVHC=Yes, Response Time=100ns, Reverse Breakdown Voltage=60V, Reverse Voltage=60V, Reverse Voltage (DC)=60V, Rise Time=100ns, RoHS=Compliant, Schedule B="8541406010, 8541406010|8541406010|8541406010|8541406010|8541406010", Stock=49982, Supplier=DigiKey, Supplier 1=DigiKey, Viewing Angle=130°, Wavelength=940nm, Width=3.9mm